# EAGLE board cwm (EAGLE 7.5.0)

Size 49.2 x 41.9 mm. Coordinates in mm from the lower left corner, seen from the top.
Outline: 0,0 49.2,0 49.2,41.9 0,41.9 0,0
Copper layers (1*16): Top 0.035mm / dielectric 1.5mm / Bottom 0.035mm
Design rules "default": minimum track width 10mil, minimum drill 24mil, track to track 8mil, track to pad 8mil, pad to pad 8mil, via to via 8mil, smd to smd 8mil, copper to edge 40mil, drill to drill 8mil, minimum pad ring 10mil, minimum via ring 8mil, stop-mask expansion 4mil, vias tented up to drill 0mil, thermal gap 10mil
Net classes: 1 VIN: width 0.254 mm, drill 0.4 mm, clearance 0.2 mm; 2 GND: width 0.254 mm, drill 0.4 mm, clearance 0.2 mm; 3 VCC: width 0.254 mm, drill 0.4 mm, clearance 0.2 mm

## Footprints (pad centres in the part's own frame; a part is rotated, then mirrored left to right if it is on the bottom)
C0402 = smd 0.7 x 0.9: 1 -0.65,0; 2 0.65,0
C0805 = smd 1.3 x 1.5: 1 -0.95,0; 2 0.95,0
L3225M = smd 1.6 x 2.2: 1 -1.4,0; 2 1.4,0
PLCC-6-LED = smd 0.7 x 1.3: AB -1.1,1.475; AG 1.1,1.475; AR 0,1.475; CB -1.1,-1.475; CG 1.1,-1.475; CR 0,-1.475
PLCC-2 = smd 1.6 x 2.6: P$1 -1.5,0; P$2 1.5,0
R0603 = smd 1 x 1.1: 1 -0.85,0; 2 0.85,0
R0402 = smd 0.7 x 0.9: 1 -0.65,0; 2 0.65,0
TACTILE-PTH = drill 1.016 pad 1.88: 1 -3.251,2.261; 2 3.251,2.261; 3 -3.251,-2.261; 4 3.251,-2.261
MK15 = smd 2 x 1.3: 1 -9.1,0; 2 9.1,0
SOT-23 = smd 0.787 x 0.889: 1 0.025,-1.016; 2 -0.94,1.016; 3 0.991,1.016
TQFP64 = smd 0.22 x 1: 1 -3.75,-5.75; 2 -3.25,-5.75; 3 -2.75,-5.75; 4 -2.25,-5.75; 5 -1.75,-5.75; 6 -1.25,-5.75; 7 -0.75,-5.75; 8 -0.25,-5.75; 9 0.25,-5.75; 10 0.75,-5.75; 11 1.25,-5.75; 12 1.75,-5.75; 13 2.25,-5.75; 14 2.75,-5.75; 15 3.25,-5.75; 16 3.75,-5.75; 33 3.75,5.75; 34 3.25,5.75; 35 2.75,5.75; 36 2.25,5.75; 37 1.75,5.75; 38 1.25,5.75; 39 0.75,5.75; 40 0.25,5.75; 41 -0.25,5.75; 42 -0.75,5.75; 43 -1.25,5.75; 44 -1.75,5.75; 45 -2.25,5.75; 46 -2.75,5.75; 47 -3.25,5.75; 48 -3.75,5.75 | smd 1 x 0.22: 17 5.75,-3.75; 18 5.75,-3.25; 19 5.75,-2.75; 20 5.75,-2.25; 21 5.75,-1.75; 22 5.75,-1.25; 23 5.75,-0.75; 24 5.75,-0.25; 25 5.75,0.25; 26 5.75,0.75; 27 5.75,1.25; 28 5.75,1.75; 29 5.75,2.25; 30 5.75,2.75; 31 5.75,3.25; 32 5.75,3.75; 49 -5.75,3.75; 50 -5.75,3.25; 51 -5.75,2.75; 52 -5.75,2.25; 53 -5.75,1.75; 54 -5.75,1.25; 55 -5.75,0.75; 56 -5.75,0.25; 57 -5.75,-0.25; 58 -5.75,-0.75; 59 -5.75,-1.25; 60 -5.75,-1.75; 61 -5.75,-2.25; 62 -5.75,-2.75; 63 -5.75,-3.25; 64 -5.75,-3.75
SOT23-5L = smd 0.55 x 1.2: 1 -0.95,-1.3; 2 0,-1.3; 3 0.95,-1.3; 4 0.95,1.3; 5 -0.95,1.3
LGA-24 = smd 0.7 x 0.29: 1 -1.875,1.25; 2 -1.875,0.75; 3 -1.875,0.25; 4 -1.875,-0.25; 5 -1.875,-0.75; 6 -1.875,-1.25; 13 1.875,-1.25; 14 1.875,-0.75; 15 1.875,-0.25; 16 1.875,0.25; 17 1.875,0.75; 18 1.875,1.25 | smd 0.29 x 0.7: 7 -1.25,-1.875; 8 -0.75,-1.875; 9 -0.25,-1.875; 10 0.25,-1.875; 11 0.75,-1.875; 12 1.25,-1.875; 19 1.25,1.875; 20 0.75,1.875; 21 0.25,1.875; 22 -0.25,1.875; 23 -0.75,1.875; 24 -1.25,1.875
MS5803 = smd 2.25 x 0.9: 1 -2.675,1.9; 2 -2.675,0.65; 4 -2.675,-1.9; 5 2.675,-1.9; 6 2.675,-0.65; 7 2.675,0.65; 8 2.675,1.9 | smd 2.8 x 0.9: 3 -2.4,-0.65
WSON8L = smd 1.2 x 0.45: 1 -4,1.905; 2 -4,0.635; 3 -4,-0.635; 4 -4,-1.905; 5 4,-1.905; 6 4,-0.635; 7 4,0.635; 8 4,1.905 | smd 4.7 x 4.6: P$0 0,0
RN4020 = smd 2 x 0.8: 1 0,10.9; 2 0,9.7; 3 0,8.5; 4 0,7.3; 5 0,6.1; 6 0,4.9; 7 0,3.7; 8 0,2.5; 17 11.5,2.5; 18 11.5,3.7; 19 11.5,4.9; 20 11.5,6.1; 21 11.5,7.3; 22 11.5,8.5; 23 11.5,9.7; 24 11.5,10.9 | smd 1 x 1: 9 0,0; 16 11.5,0 | smd 0.8 x 2: 10 2.75,0; 11 3.95,0; 12 5.15,0; 13 6.35,0; 14 7.55,0; 15 8.75,0 | smd 1 x 1.6: SHIELD1 0.8,12.7; SHIELD2 10.7,12.7
LTR-303ALS = smd 0.3 x 0.65: 1 -0.65,-0.9; 2 0,-0.9; 3 0.65,-0.9; 4 0.65,0.9; 5 0,0.9; 6 -0.65,0.9
SO08 = smd 0.61 x 2.21: 1 -1.905,-2.616; 2 -0.635,-2.616; 3 0.635,-2.616; 4 1.905,-2.616; 5 1.905,2.616; 6 0.635,2.616; 7 -0.635,2.616; 8 -1.905,2.616
S95466-AAA = smd 0.4 x 3: 1 -14.4,0; 2 -13.6,0; 3 -12.8,0; 4 -12,0; 5 -11.2,0; 6 -10.4,0; 7 -9.6,0; 8 -8.8,0; 9 -8,0; 10 -7.2,0; 11 -6.4,0; 12 -5.6,0; 13 -4.8,0; 14 -4,0; 15 -3.2,0; 16 -2.4,0; 17 -1.6,0; 18 -0.8,0; 19 0,0; 20 0.8,0; 21 1.6,0; 22 2.4,0; 23 3.2,0; 24 4,0; 25 4.8,0; 26 5.6,0; 27 6.4,0; 28 7.2,0; 29 8,0; 30 8.8,0; 31 9.6,0; 32 10.4,0; 33 11.2,0; 34 12,0; 35 12.8,0; 36 13.6,0; 37 14.4,0
MSOP10 = smd 0.9 x 0.29: 1 -2.2,0.8; 2 -2.2,0.3; 3 -2.2,-0.2; 4 -2.2,-0.7; 5 -2.2,-1.2; 6 2.1,-1.2; 7 2.1,-0.7; 8 2.1,-0.2; 9 2.1,0.3; 10 2.1,0.8
2.0X1.6-4-PAD = smd 0.875 x 0.775: 1 -0.637,-0.487; 2 0.637,-0.487; 3 0.637,0.487; 4 -0.637,0.487
2.0X1.2-2PAD = smd 0.6 x 1.1: 1 -0.7,0; 2 0.7,0

## Placement (x,y rotation side)
C8  15nF  [C0402]  20.96,7.81 180 top
C9  22uF  [C0805]  12.81,2.66 90 top
L1  10uH  [L3225M]  16.16,3.04 90 top
LED1  SFT825N-S  [PLCC-6-LED]  31.75,5.08 0 top
PT1  VEMT3700F  [PLCC-2]  38.5,2.5 0 top
PT2  VEMT3700F  [PLCC-2]  44,4 0 top
R1  1R  [R0603]  1.5,-6.5 0 top  (outside the outline)
R20  60k  [R0402]  10.64,5.96 270 top
R21  15k  [R0402]  26.99,6.57 270 top
R23  200k-1%  [R0402]  15.89,6.84 0 top
R24  340k-1%  [R0402]  26.99,2.96 270 top
S1  SWITCH-MOMENTARY-2PTH  [TACTILE-PTH]  24.5,30.5 0 top
S2  REED-SWITCH-MK15-C2  [MK15]  24,11.5 0 top
S3  SWITCH-MOMENTARY-2PTH  [TACTILE-PTH]  24.5,37.5 0 top
T1  [SOT-23]  1.5,39 0 top
T2  [SOT-23]  5,39 0 top
T3  [SOT-23]  8.5,39 0 top
T4  [SOT-23]  12,39 0 top
T5  [SOT-23]  15.5,39 0 top
U1  STM32L476  [TQFP64]  22.86,19.36 0 top
U2  24AA64T  [SOT23-5L]  10.97,13.16 0 top
U3  LSM9DS0  [LGA-24]  12.7,19.05 0 top
U4  MS5803-14BA  [MS5803]  12.55,33.56 0 top
U5  MX25L25635F  [WSON8L]  36.83,20.32 0 top
U6  RN4020  [RN4020]  34.29,39.37 270 top
U7  LTR-303ALS  [LTR-303ALS]  6.39,2.54 0 top
U8  LM393  [SO08]  45,13.5 0 top
U$1  S95466-AAA  [S95466-AAA]  5.08,20.32 270 top
U$2  VSML3710  [PLCC-2]  38.5,7 0 top
U$9  LTC3440  [MSOP10]  22.39,3.91 0 top
X1  EPSON FA-128 24.0000MF10Z-W3  [2.0X1.6-4-PAD]  14,24 0 top
X2  ABS06-32.768KHZ-9-1-T  [2.0X1.2-2PAD]  15,28.5 0 top

## Library data of the parts
C8 C9 L1 R1 R20 R21 R23 R24 = resistor
LED1 = SparkFun-LED; PROD_ID: DIO-12113
PT1 PT2 U$2 = vishay_opto
S1 S3 = SparkFun-Electromechanical; PROD_ID: SWCH-08441
S2 = switch-reed; MF: MEDER; MPN: MK15-C-2; OC_FARNELL: 1079485
T1-T5 = zetex; OC_FARNELL: unknown; OC_NEWARK: unknown
U1 U3 = SparkFun-DigitalIC
U2 = microchip; MF: MICROCHIP; MPN: 24AA00T-I/OTG; OC_FARNELL: 1331264; OC_NEWARK: 89H3038
U4 = MS5803; PROD_ID: IC-12111
U5 = MX25L25635F
U6 = RN4020
U7 = LTR_303ALS
U8 = SparkFun-AnalogIC
U$1 = screen_37pin
U$9 = SparkFun
X1 X2 = IQD-Frequency-Products

## Nets
AGND: U1.12
B0: U1.26 U$1.1
B1: U1.27 U$1.2
B2: U1.28 U$1.3
B3: U1.55 U$1.4
B4: U1.56 U$1.22
B5: U1.57 U$1.35
B6: U1.58 U$1.36
B7: U1.59 U$1.37
B8: U1.61 U$1.23
B9: U1.62 U$1.24
B10: U1.29 U$1.25
B11: U1.30 U$1.26
B12: U1.33 U$1.27
B13: U1.34 U$1.28
B14: U1.35 U$1.29
B15: U1.36 U$1.30
GND [GND]: C9.2 R20.2 R23.1 T1.2 T2.2 T3.2 T4.2 T5.2 U1.18 U1.63 U2.2 U6.24 U7.3 U$1.5 U$1.7 U$1.34 U$9.5
GND1: U6.1
GND2: U6.9
GND3: U6.16
N$1 [VIN]: S2.2 U$9.7 U$9.8
N$2: T4.1 U$1.17 U$1.18 U$1.19 U$1.20
N$3: T5.1 U$2.P$2
N$4: R1.1 T4.3
N$5: U$9.2
N$6: U$1.8
N$7: U$1.31
N$8: U$1.9
N$9: U$1.10
N$28: L1.2 U$9.3
N$29: L1.1 U$9.4
N$52: R20.1 U$9.1
N$70: C8.2 R23.2 R24.1 U$9.9
N$73: R21.2 U$9.10
N$74: C8.1 R21.1
V+: U8.8
V-: U8.4
VCC [VCC]: C9.1 R24.2 U1.1 U1.19 U1.32 U1.48 U1.64 U2.4 U$1.6 U$1.16 U$1.32 U$1.33 U$9.6
VDD: U1.13 U6.23 U7.1
VIN [VIN]: S2.1

## Tracks (layer width: path | path; a pad name or v marks a point on that pad's centre or on a via)
B0  (1 unrouted)
B1  (1 unrouted)
B2  (1 unrouted)
B3  (1 unrouted)
B4  (1 unrouted)
B5  (1 unrouted)
B6  (1 unrouted)
B7  (1 unrouted)
B8  (1 unrouted)
B9  (1 unrouted)
B10  (1 unrouted)
B11  (1 unrouted)
B12  (1 unrouted)
B13  (1 unrouted)
B14  (1 unrouted)
B15  (1 unrouted)
GND  (16 unrouted)
N$1  (2 unrouted)
N$2  (4 unrouted)
N$3  (1 unrouted)
N$4  (1 unrouted)
N$28  (1 unrouted)
N$29  (1 unrouted)
N$52  (1 unrouted)
N$70  (3 unrouted)
N$73  (1 unrouted)
N$74  (1 unrouted)
VCC  (12 unrouted)
VDD  (2 unrouted)